# Altium PCB fileghep.PcbDoc (part 2 of 2)
Units mm, origin at the board's own origin, x right, y up, seen from the top; angles counter-clockwise.
Board outline 152.4 x 101.6 mm, 2 copper layers (Top Layer, Bottom Layer); 174 components, 42 nets, 882 pads, 102 vias.
Unrouted connection lines stored in the file: 150.
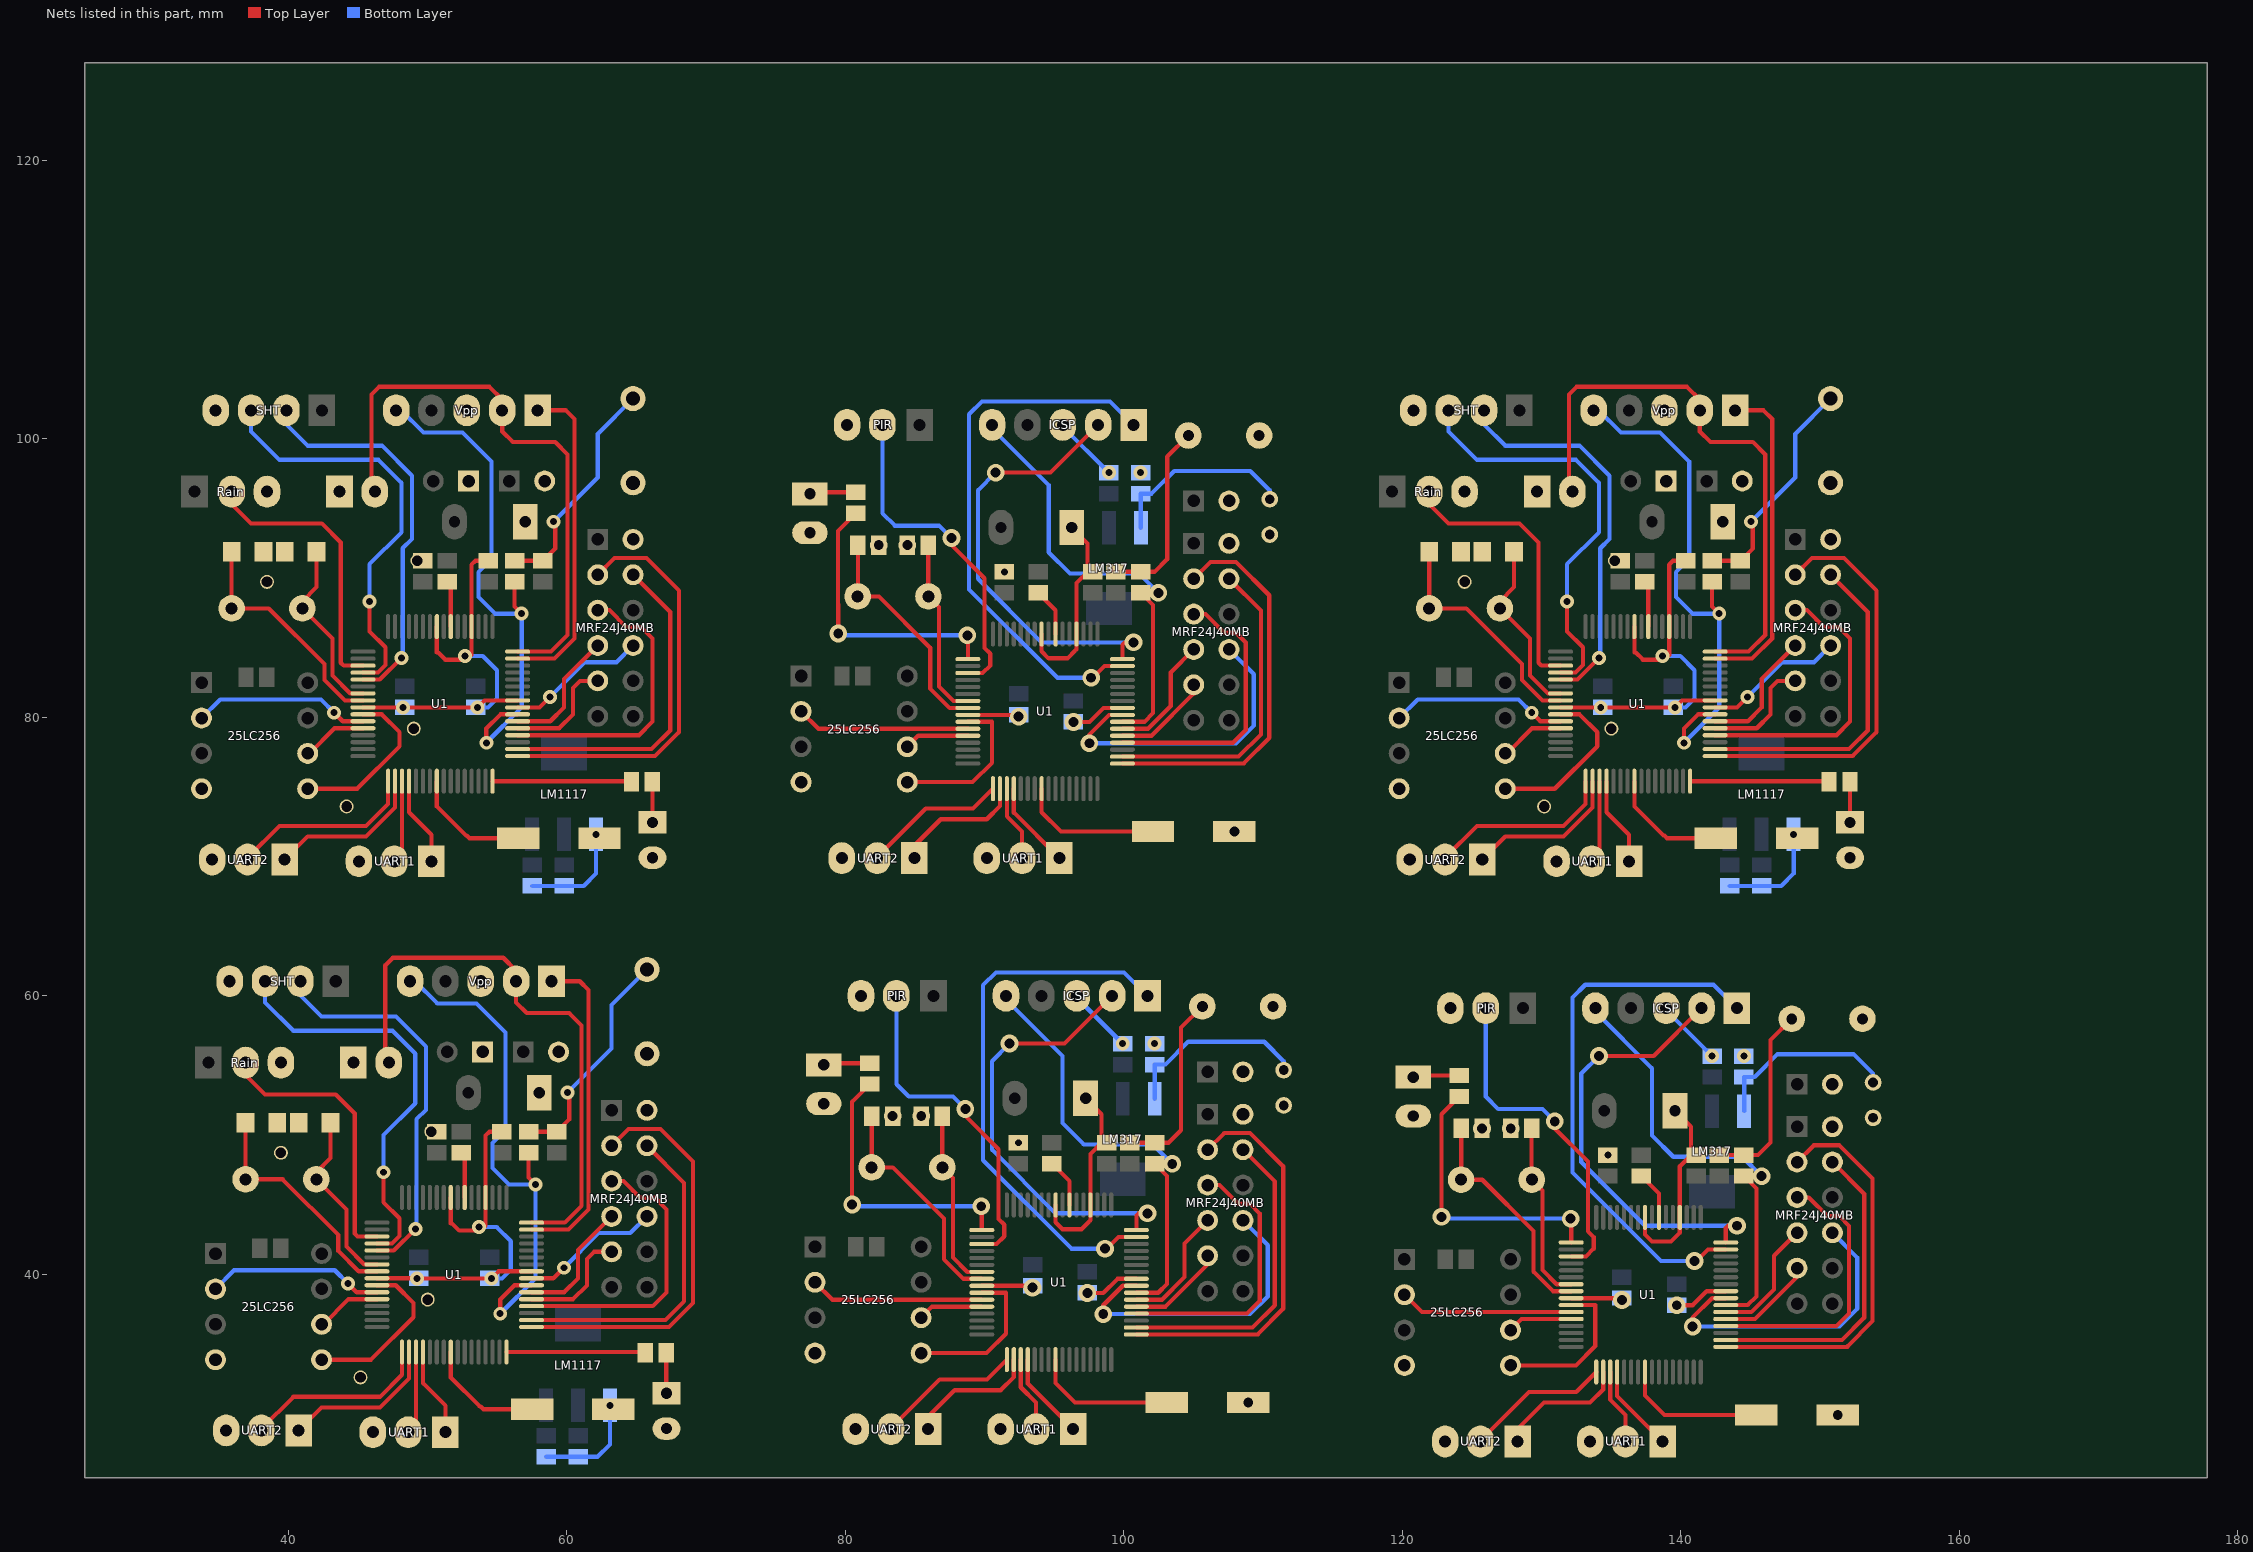
[diagram p2: the nets of this part, all layers, seen from the top]

## Via types
v1: diameter 1, hole 0.5, Top Layer to Bottom Layer, 57 vias
v2: diameter 1.27, hole 0.711, Top Layer to Bottom Layer, 45 vias

## Nets (pads, with @x,y where several pads share a name; then routed paths per layer and width w, separated by ;. In a path a pad name is that pad's centre, name@x,y a point inside that pad or via, vN(x,y) a via of type N, cw(c..) or ccw(c..) an arc to the next point about the centre after c; other vN are vias at no path point) (continued)
GND: 3.3.2 3.3V.2 5VDC.1 25LC256.4 C1.1 C2.1 C3.2 C4.1@54.352,91.245 C4.1@55.352,50.245 C4.1@140.352,91.245 C4.2@97.786,90.453 C4.2@98.786,49.453 C4.2@141.114,48.564 C5.1@91.436,90.453 C5.1@92.436,49.453 C5.1@134.764,48.564 C5.2@48.383,80.728 C5.2@49.383,39.728 C5.2@134.383,80.728 C6.2 C7.2 C8.1 C9.1 D0.2 D1.2 DIODE1.2 ICSP.3 LM317.1 LM1117.1 MQ6.1 MRF24J40MB.2 pad.0 PIR.3 Rain.3 SHT.4 SW.1 SW_BUTTON.1 U1.9 U1.20 U1.25 U1.41 UART1.3 UART2.3 Vpp.3 | length 192.3
  Top Layer w0.3: U1.41@45.373,80.72 48.252,80.72 v1(48.256,80.716) v1(53.59,80.716) 54.094,81.22 U1.9@56.473,81.22 ; U1.41@46.373,39.72 49.252,39.72 v1(49.256,39.716) v1(54.59,39.716) 55.094,40.22 U1.9@57.473,40.22 ; 50.673,84.649 U1.25@50.673,86.52 ; 50.773,84.649 51.277,84.145 52.828,84.145 53.173,84.49 U1.20@53.173,86.52 53.173,90.967 53.451,91.245 C4.1@54.352,91.245 ; 51.673,43.649 U1.25@51.673,45.52 ; 51.773,43.649 52.277,43.145 53.828,43.145 54.173,43.49 U1.20@54.173,45.52 54.173,49.967 54.451,50.245 C4.1@55.352,50.245 ; v2(84.463,92.37) C9.1@84.578,92.485 ; v2(85.463,51.37) C9.1@85.578,51.485 ; U1.41@88.807,80.182 92.321,80.182 v2(92.452,80.051) ; U1.41@89.807,39.182 93.321,39.182 v2(93.452,39.051) ; U1.25@94.107,85.982 94.107,84.746 94.611,84.242 95.966,84.242 96.507,84.783 ; U1.25@95.107,44.982 95.107,43.746 95.611,43.242 96.966,43.242 97.507,43.783 ; DIODE1.2@96.262,93.64 97.405,92.497 97.405,90.453 96.607,89.655 U1.20@96.607,85.982 96.607,84.883 ; v2(96.389,79.67) 97.532,79.67 98.544,80.682 U1.9@99.907,80.682 ; DIODE1.2@97.262,52.64 98.405,51.497 98.405,49.453 97.607,48.655 U1.20@97.607,44.982 97.607,43.883 ; v2(97.389,38.67) 98.532,38.67 99.544,39.682 U1.9@100.907,39.682 ; v2(127.791,50.481) C9.1@127.906,50.596 ; U1.41@131.373,80.72 134.252,80.72 v1(134.256,80.716) v1(139.59,80.716) 140.094,81.22 U1.9@142.473,81.22 ; U1.41@132.135,38.293 135.649,38.293 v2(135.78,38.162) ; 136.673,84.649 U1.25@136.673,86.52 ; 136.773,84.649 137.277,84.145 138.828,84.145 139.173,84.49 U1.20@139.173,86.52 139.173,90.967 139.451,91.245 C4.1@140.352,91.245 ; U1.25@137.435,44.093 137.435,42.857 137.939,42.353 139.294,42.353 139.835,42.894 ; DIODE1.2@139.59,51.751 140.733,50.608 140.733,48.564 139.935,47.766 U1.20@139.935,44.093 139.935,42.994 ; v2(139.717,37.781) 140.86,37.781 141.872,38.793 U1.9@143.235,38.793
  Bottom Layer w0.3: v1(52.701,84.399) 53.971,84.399 54.987,83.383 54.987,81.351 54.352,80.716 v1(53.59,80.716) ; v1(53.701,43.399) 54.971,43.399 55.987,42.383 55.987,40.351 55.352,39.716 v1(54.59,39.716) ; C1.1@57.527,67.901 C2.1@59.813,67.901 61.222,67.901 62.113,68.792 v1(62.113,71.593) ; C1.1@58.527,26.901 C2.1@60.813,26.901 62.222,26.901 63.113,27.792 v1(63.113,30.593) ; ICSP.3@95.627,101.006 95.627,100.867 C2.1@98.929,97.565 ; ICSP.3@96.627,60.006 96.627,59.867 C2.1@99.929,56.565 ; v1(138.701,84.399) 139.971,84.399 140.987,83.383 140.987,81.351 140.352,80.716 v1(139.59,80.716) ; ICSP.3@138.955,59.117 138.955,58.978 C2.1@142.257,55.676 ; C1.1@143.527,67.901 C2.1@145.813,67.901 147.222,67.901 148.113,68.792 v1(148.113,71.593)
  other v1: 134.764,48.564 92.436,49.453 142.257,55.688 144.543,55.688 99.929,56.577 102.215,56.577 91.436,90.453 98.929,97.577 101.215,97.577
  other v2: 151.274,29.907 108.946,30.796 125.735,50.481 83.407,51.37 107.946,71.796 82.407,92.37
INT: 
INT0: PIR.2 Rain.2 U1.35 | length 133.1
  Top Layer w0.3: Rain.2@35.937,96.21 35.937,95.321 37.334,93.924 42.414,93.924 43.776,92.562 43.776,83.926 43.982,83.72 U1.35@45.373,83.72 ; Rain.2@36.937,55.21 36.937,54.321 38.334,52.924 43.414,52.924 44.776,51.562 44.776,42.926 44.982,42.72 U1.35@46.373,42.72 ; v2(87.626,92.878) 87.626,92.37 90.007,89.989 90.007,84.983 90.42,84.57 90.42,83.734 89.868,83.182 U1.35@88.807,83.182 ; v2(88.626,51.878) 88.626,51.37 91.007,48.989 91.007,43.983 91.42,43.57 91.42,42.734 90.868,42.182 U1.35@89.807,42.182 ; Rain.2@121.937,96.21 121.937,95.321 123.334,93.924 128.414,93.924 129.776,92.562 129.776,83.926 129.982,83.72 U1.35@131.373,83.72 ; v2(130.954,50.989) 130.954,50.481 133.335,48.1 133.335,43.094 133.748,42.681 133.748,41.845 133.196,41.293 U1.35@132.135,41.293
  Bottom Layer w0.3: PIR.2@82.673,101.006 82.673,94.656 83.562,93.767 86.737,93.767 v2(87.626,92.878) ; PIR.2@83.673,60.006 83.673,53.656 84.562,52.767 87.737,52.767 v2(88.626,51.878) ; PIR.2@126.001,59.117 126.001,52.767 126.89,51.878 130.065,51.878 v2(130.954,50.989)
INT1_RP21: MRF24J40MB.5 U1.4 | length 122.8
  Top Layer w0.3: U1.4@56.473,78.72 65.183,78.72 66.163,79.7 66.163,85.669 65.331,86.501 64.269,86.501 63.069,87.701 MRF24J40MB.5@62.226,87.701 ; U1.4@57.473,37.72 66.183,37.72 67.163,38.7 67.163,44.669 66.331,45.501 65.269,45.501 64.069,46.701 MRF24J40MB.5@63.226,46.701 ; U1.4@99.907,78.182 107.855,78.182 108.765,79.092 108.765,85.374 108.062,86.077 107.208,86.077 105.868,87.417 MRF24J40MB.5@105.025,87.417 ; U1.4@100.907,37.182 108.855,37.182 109.765,38.092 109.765,44.374 109.062,45.077 108.208,45.077 106.868,46.417 MRF24J40MB.5@106.025,46.417 ; U1.4@142.473,78.72 151.183,78.72 152.163,79.7 152.163,85.669 151.331,86.501 150.269,86.501 149.069,87.701 MRF24J40MB.5@148.226,87.701 ; U1.4@143.235,36.293 151.183,36.293 152.093,37.203 152.093,43.485 151.39,44.188 150.536,44.188 149.196,45.528 MRF24J40MB.5@148.353,45.528
LED: R4.2 U1.33@88.807,84.182 U1.33@89.807,43.182 U1.33@132.135,42.293 U1.64@54.673,75.42 U1.64@55.673,34.42 U1.64@140.673,75.42 | length 92.5
  Top Layer w0.3: U1.64@54.673,75.42 64.613,75.42 R4.2@64.651,75.382 ; U1.64@55.673,34.42 65.613,34.42 R4.2@65.651,34.382 ; v2@79.244,85.766 v2(79.498,86.02) 79.498,88.101 79.493,88.106 79.493,93.392 R4.2@80.768,94.668 ; v2@80.244,44.766 v2(80.498,45.02) 80.498,47.101 80.493,47.106 80.493,52.392 R4.2@81.768,53.668 ; v2(88.769,85.893) 88.807,85.855 U1.33@88.807,84.182 ; v2(89.769,44.893) 89.807,44.855 U1.33@89.807,43.182 ; v2@122.572,43.877 v2(122.826,44.131) 122.826,46.212 122.821,46.217 122.821,51.503 R4.2@124.096,52.779 ; v2(132.097,44.004) 132.135,43.966 U1.33@132.135,42.293 ; U1.64@140.673,75.42 150.613,75.42 R4.2@150.651,75.382
  Bottom Layer w0.3: v2(79.498,86.02) 79.371,85.893 v2(88.769,85.893) ; v2(80.498,45.02) 80.371,44.893 v2(89.769,44.893) ; v2(122.826,44.131) 122.699,44.004 v2(132.097,44.004)
Net5VDC_2: 5VDC.2@110.486,95.672 5VDC.2@111.486,54.672 5VDC.2@153.814,53.783 C1.2@101.215,96.065 C1.2@102.215,55.065 C1.2@144.543,54.176 LM317.3 | length 40.8
  Bottom Layer w0.3: LM317.3@101.229,93.619 101.229,96.051 C1.2@101.215,96.065 101.989,96.065 103.628,97.704 109.089,97.704 110.486,96.307 5VDC.2@110.486,95.672 ; LM317.3@102.229,52.619 102.229,55.051 C1.2@102.215,55.065 102.989,55.065 104.628,56.704 110.089,56.704 111.486,55.307 5VDC.2@111.486,54.672 ; LM317.3@144.557,51.73 144.557,54.162 C1.2@144.543,54.176 145.317,54.176 146.956,55.815 152.417,55.815 153.814,54.418 5VDC.2@153.814,53.783
NetC6_1: C6.1@56.511,71.318 C6.1@57.511,30.318 C6.1@142.511,71.318 U1.56@50.673,75.42 U1.56@51.673,34.42 U1.56@136.673,75.42 | length 25.8
  Top Layer w0.3: U1.56@50.673,75.42 50.673,73.6 52.759,71.514 52.824,71.514 53.02,71.318 C6.1@56.511,71.318 ; U1.56@51.673,34.42 51.673,32.6 53.759,30.514 53.824,30.514 54.02,30.318 C6.1@57.511,30.318 ; U1.56@136.673,75.42 136.673,73.6 138.759,71.514 138.824,71.514 139.02,71.318 C6.1@142.511,71.318
NetC7_1: C7.1@102.104,71.796 C7.1@103.104,30.796 C7.1@145.432,29.907 U1.56@94.107,74.882 U1.56@95.107,33.882 U1.56@137.435,32.993 | length 30.8
  Top Layer w0.3: U1.56@94.107,74.882 94.107,73.189 95.5,71.796 C7.1@102.104,71.796 ; U1.56@95.107,33.882 95.107,32.189 96.5,30.796 C7.1@103.104,30.796 ; U1.56@137.435,32.993 137.435,31.3 138.828,29.907 C7.1@145.432,29.907
NetD0_1: D0.1 R4.1@66.151,75.382 R4.1@67.151,34.382 R4.1@152.151,75.382 | length 8.8
  Top Layer w0.3: R4.1@66.151,75.382 66.151,72.473 D0.1@66.163,72.461 ; R4.1@67.151,34.382 67.151,31.473 D0.1@67.163,31.461 ; R4.1@152.151,75.382 152.151,72.473 D0.1@152.163,72.461
NetD1_1: D1.1 R4.1@80.768,96.168 R4.1@81.768,55.168 R4.1@124.096,54.279 | length 10
  Top Layer w0.3: D1.1@77.466,96.053 77.581,96.168 R4.1@80.768,96.168 ; D1.1@78.466,55.053 78.581,55.168 R4.1@81.768,55.168 ; D1.1@120.794,54.164 120.909,54.279 R4.1@124.096,54.279
NetR1_1: R1.1 R2.1 SW.2 SW_BUTTON.2 | length 91.3
  Top Layer w0.3: R2.1@56.257,91.245 R1.1@58.289,91.245 59.178,92.134 59.178,94.178 v1(59.051,94.051) ; R2.1@57.257,50.245 R1.1@59.289,50.245 60.178,51.134 60.178,53.178 v1(60.051,53.051) ; R1.1@99.31,90.453 R2.1@101.215,90.453 102.219,90.453 103.12,91.354 103.12,98.72 SW_BUTTON.2@104.644,100.244 ; R1.1@100.31,49.453 R2.1@102.215,49.453 103.219,49.453 104.12,50.354 104.12,57.72 SW_BUTTON.2@105.644,59.244 ; R2.1@142.257,91.245 R1.1@144.289,91.245 145.178,92.134 145.178,94.178 v1(145.051,94.051) ; R1.1@142.638,48.564 R2.1@144.543,48.564 145.547,48.564 146.448,49.465 146.448,56.831 SW_BUTTON.2@147.972,58.355
  Bottom Layer w0.3: v1(59.051,94.051) 62.226,97.226 62.226,100.35 SW.2@64.766,102.89 ; v1(60.051,53.051) 63.226,56.226 63.226,59.35 SW.2@65.766,61.89 ; v1(145.051,94.051) 148.226,97.226 148.226,100.35 SW.2@150.766,102.89
OSCI: C9.2 U1.39 Y1.1 | length 77.7
  Top Layer w0.3: C9.2@42.033,91.892 42.033,89.352 41.017,88.336 Y1.1@41.017,87.828 43.176,85.669 43.176,83.002 44.458,81.72 U1.39@45.373,81.72 ; C9.2@43.033,50.892 43.033,48.352 42.017,47.336 Y1.1@42.017,46.828 44.176,44.669 44.176,42.002 45.458,40.72 U1.39@46.373,40.72 ; C9.2@85.963,92.37 85.963,88.699 Y1.1@85.975,88.687 86.737,87.925 86.737,82.21 87.765,81.182 U1.39@88.807,81.182 ; C9.2@86.963,51.37 86.963,47.699 Y1.1@86.975,47.687 87.737,46.925 87.737,41.21 88.765,40.182 U1.39@89.807,40.182 ; C9.2@128.033,91.892 128.033,89.352 127.017,88.336 Y1.1@127.017,87.828 129.176,85.669 129.176,83.002 130.458,81.72 U1.39@131.373,81.72 ; C9.2@129.291,50.481 129.291,46.81 Y1.1@129.303,46.798 130.065,46.036 130.065,40.321 131.093,39.293 U1.39@132.135,39.293
OSCO: C8.2 U1.40 Y1.2 | length 100.6
  Top Layer w0.3: C8.2@35.937,91.892 Y1.2@35.937,87.828 38.604,87.828 42.598,83.834 42.598,82.691 44.069,81.22 U1.40@45.373,81.22 ; C8.2@36.937,50.892 Y1.2@36.937,46.828 39.604,46.828 43.598,42.834 43.598,41.691 45.069,40.22 U1.40@46.373,40.22 ; C8.2@80.907,92.37 80.907,88.699 Y1.2@80.895,88.687 82.419,88.687 86.102,85.004 86.102,82.083 87.503,80.682 U1.40@88.807,80.682 ; C8.2@81.907,51.37 81.907,47.699 Y1.2@81.895,47.687 83.419,47.687 87.102,44.004 87.102,41.083 88.503,39.682 U1.40@89.807,39.682 ; C8.2@121.937,91.892 Y1.2@121.937,87.828 124.604,87.828 128.598,83.834 128.598,82.691 130.069,81.22 U1.40@131.373,81.22 ; C8.2@124.235,50.481 124.235,46.81 Y1.2@124.223,46.798 125.747,46.798 129.43,43.115 129.43,40.194 130.831,38.793 U1.40@132.135,38.793
PGC: ICSP.1 U1.15 Vpp.1 | length 188.5
  Top Layer w0.3: U1.15@56.473,84.22 59.126,84.22 60.57,85.664 60.57,101.417 59.935,102.052 Vpp.1@57.908,102.052 ; U1.15@57.473,43.22 60.126,43.22 61.57,44.663 61.57,60.417 60.935,61.052 Vpp.1@58.908,61.052 ; v2(97.659,82.845) 97.786,82.845 98.623,83.682 U1.15@99.907,83.682 ; v2(98.659,41.845) 98.786,41.845 99.623,42.682 U1.15@100.907,42.682 ; v2(140.987,40.956) 141.114,40.956 141.951,41.793 U1.15@143.235,41.793 ; U1.15@142.473,84.22 145.126,84.22 146.57,85.664 146.57,101.417 145.935,102.052 Vpp.1@143.908,102.052
  Bottom Layer w0.3: v2(97.659,82.845) 95.246,82.845 88.896,89.195 88.896,101.768 89.817,102.689 99.024,102.689 ICSP.1@100.707,101.006 ; v2(98.659,41.845) 96.246,41.845 89.896,48.195 89.896,60.768 90.817,61.689 100.024,61.689 ICSP.1@101.707,60.006 ; v2(140.987,40.956) 138.574,40.956 132.224,47.306 132.224,59.879 133.145,60.8 142.352,60.8 ICSP.1@144.035,59.117
PGD: ICSP.2 MQ6.2 U1.16 Vpp.2 | length 221.2
  Top Layer w0.3: MQ6.2@46.224,96.21 45.97,96.464 45.97,103.195 46.513,103.738 54.444,103.738 55.368,102.814 Vpp.2@55.368,102.052 55.368,100.528 56.13,99.766 59.178,99.766 60.067,98.877 60.067,85.923 58.864,84.72 U1.16@56.473,84.72 ; MQ6.2@47.224,55.21 46.97,55.464 46.97,62.195 47.513,62.738 55.444,62.738 56.368,61.814 Vpp.2@56.368,61.052 56.368,59.528 57.13,58.766 60.178,58.766 61.067,57.877 61.067,44.923 59.864,43.72 U1.16@57.473,43.72 ; v2(90.801,97.577) 94.738,97.577 ICSP.2@98.167,101.006 ; v2(91.801,56.577) 95.738,56.577 ICSP.2@99.167,60.006 ; U1.16@99.907,84.182 99.907,85.22 100.072,85.385 v2(100.707,85.385) ; U1.16@100.907,43.182 100.907,44.22 101.072,44.385 v2(101.707,44.385) ; MQ6.2@132.224,96.21 131.97,96.464 131.97,103.195 132.513,103.738 140.444,103.738 141.368,102.814 Vpp.2@141.368,102.052 141.368,100.528 142.13,99.766 145.178,99.766 146.067,98.877 146.067,85.923 144.864,84.72 U1.16@142.473,84.72 ; v2(134.129,55.688) 138.066,55.688 ICSP.2@141.495,59.117 ; U1.16@143.235,42.293 143.235,43.331 143.4,43.496 v2(144.035,43.496)
  Bottom Layer w0.3: v2(90.801,97.577) 89.531,96.307 89.531,89.957 94.103,85.385 v2(100.707,85.385) ; v2(91.801,56.577) 90.531,55.307 90.531,48.957 95.103,44.385 v2(101.707,44.385) ; v2(134.129,55.688) 132.859,54.418 132.859,48.068 137.431,43.496 v2(144.035,43.496)
RB10: R3.2 U1.23 | length 20.5
  Top Layer w0.3: R3.2@51.431,89.745 51.673,89.503 U1.23@51.673,86.52 ; R3.2@52.431,48.745 52.673,48.503 U1.23@52.673,45.52 ; R3.2@93.849,88.953 95.107,87.695 U1.23@95.107,85.982 ; R3.2@94.849,47.953 96.107,46.695 U1.23@96.107,44.982 ; R3.2@137.177,47.064 138.435,45.806 U1.23@138.435,44.093 ; R3.2@137.431,89.745 137.673,89.503 U1.23@137.673,86.52
RESET: 
RST_MRF: MRF24J40MB.3@62.226,90.241 MRF24J40MB.3@63.226,49.241 MRF24J40MB.3@148.226,90.241 U1.1@56.473,77.22 U1.1@57.473,36.22 U1.1@142.473,77.22 | length 89.3
  Top Layer w0.3: U1.1@56.473,77.22 66.35,77.22 68.068,78.938 68.068,89.098 65.725,91.441 63.426,91.441 MRF24J40MB.3@62.226,90.241 ; U1.1@57.473,36.22 67.35,36.22 69.068,37.938 69.068,48.098 66.725,50.441 64.426,50.441 MRF24J40MB.3@63.226,49.241 ; U1.1@142.473,77.22 152.35,77.22 154.068,78.938 154.068,89.098 151.725,91.441 149.426,91.441 MRF24J40MB.3@148.226,90.241
RSTMRF: MRF24J40MB.3@105.025,89.957 MRF24J40MB.3@106.025,48.957 MRF24J40MB.3@148.353,48.068 U1.1@99.907,76.682 U1.1@100.907,35.682 U1.1@143.235,34.793 | length 85.4
  Top Layer w0.3: U1.1@99.907,76.682 108.641,76.682 108.641,76.722 110.451,78.532 110.451,88.768 108.062,91.157 106.225,91.157 MRF24J40MB.3@105.025,89.957 ; U1.1@100.907,35.682 109.641,35.682 109.641,35.722 111.451,37.532 111.451,47.768 109.062,50.157 107.225,50.157 MRF24J40MB.3@106.025,48.957 ; U1.1@143.235,34.793 151.969,34.793 151.969,34.833 153.779,36.643 153.779,46.879 151.39,49.268 149.553,49.268 MRF24J40MB.3@148.353,48.068
SCK: 
SCK1_RP26: MRF24J40MB.9 U1.5 | length 45.8
  Top Layer w0.3: U1.5@56.473,79.22 59.46,79.22 60.448,80.208 60.448,82.113 60.956,82.621 MRF24J40MB.9@62.226,82.621 ; U1.5@57.473,38.22 60.46,38.22 61.448,39.208 61.448,41.113 61.956,41.621 MRF24J40MB.9@63.226,41.621 ; U1.5@99.907,78.682 102.005,78.682 105.025,81.702 MRF24J40MB.9@105.025,82.337 ; U1.5@100.907,37.682 103.005,37.682 106.025,40.702 MRF24J40MB.9@106.025,41.337 ; U1.5@142.473,79.22 145.46,79.22 146.448,80.208 146.448,82.113 146.956,82.621 MRF24J40MB.9@148.226,82.621 ; U1.5@143.235,36.793 145.333,36.793 148.353,39.813 MRF24J40MB.9@148.353,40.448
SCK2_RP3: 25LC256.6 U1.44 | length 28.2
  Top Layer w0.3: 25LC256.6@41.398,77.414 41.525,77.414 43.331,79.22 U1.44@45.373,79.22 ; 25LC256.6@42.398,36.414 42.525,36.414 44.331,38.22 U1.44@46.373,38.22 ; 25LC256.6@84.451,77.892 85.241,78.682 U1.44@88.807,78.682 ; 25LC256.6@85.451,36.892 86.241,37.682 U1.44@89.807,37.682 ; 25LC256.6@127.398,77.414 127.525,77.414 129.331,79.22 U1.44@131.373,79.22 ; 25LC256.6@127.779,36.003 128.569,36.793 U1.44@132.135,36.793
SCL1: SHT.2 U1.37@45.373,82.72 U1.37@46.373,41.72 U1.37@131.373,82.72 | length 85.1
  Top Layer w0.3: U1.37@45.373,82.72 46.577,82.72 v1(48.129,84.272) ; U1.37@46.373,41.72 47.577,41.72 v1(49.129,43.272) ; U1.37@131.373,82.72 132.577,82.72 v1(134.129,84.272)
  Bottom Layer w0.3: SHT.2@39.874,102.052 39.874,101.036 41.398,99.512 46.732,99.512 48.891,97.353 48.891,92.816 48.221,92.146 48.221,84.364 v1(48.129,84.272) ; SHT.2@40.874,61.052 40.874,60.036 42.398,58.512 47.732,58.512 49.891,56.353 49.891,51.816 49.221,51.146 49.221,43.364 v1(49.129,43.272) ; SHT.2@125.874,102.052 125.874,101.036 127.398,99.512 132.732,99.512 134.891,97.353 134.891,92.816 134.221,92.146 134.221,84.364 v1(134.129,84.272)
SDA1: SHT.3 U1.36@45.373,83.22 U1.36@46.373,42.22 U1.36@131.373,83.22 | length 90.6
  Top Layer w0.3: U1.36@45.373,83.22 46.442,83.22 46.986,83.764 46.986,85.034 45.843,86.177 v1(45.843,88.336) ; U1.36@46.373,42.22 47.442,42.22 47.986,42.764 47.986,44.034 46.843,45.177 v1(46.843,47.336) ; U1.36@131.373,83.22 132.442,83.22 132.986,83.764 132.986,85.034 131.843,86.177 v1(131.843,88.336)
  Bottom Layer w0.3: SHT.3@37.334,102.052 37.334,100.528 39.366,98.496 46.478,98.496 48.129,96.845 48.129,93.289 45.843,91.003 v1(45.843,88.336) ; SHT.3@38.334,61.052 38.334,59.528 40.366,57.496 47.478,57.496 49.129,55.845 49.129,52.289 46.843,50.003 v1(46.843,47.336) ; SHT.3@123.334,102.052 123.334,100.528 125.366,98.496 132.478,98.496 134.129,96.845 134.129,93.289 131.843,91.003 v1(131.843,88.336)
SDI: 
SDI1_RP27: MRF24J40MB.8 U1.8 | length 96.8
  Top Layer w0.3: U1.8@56.473,80.72 58.039,80.72 v1(58.797,81.478) ; U1.8@57.473,39.72 59.039,39.72 v1(59.797,40.478) ; v2(97.532,78.146) 97.532,78.781 98.933,80.182 U1.8@99.907,80.182 ; v2(98.532,37.146) 98.532,37.781 99.933,39.182 U1.8@100.907,39.182 ; v2(140.86,36.257) 140.86,36.892 142.261,38.293 U1.8@143.235,38.293 ; U1.8@142.473,80.72 144.039,80.72 v1(144.797,81.478)
  Bottom Layer w0.3: v1(58.797,81.478) 61.28,83.961 63.566,83.961 MRF24J40MB.8@64.766,85.161 ; v1(59.797,40.478) 62.28,42.961 64.566,42.961 MRF24J40MB.8@65.766,44.161 ; v2(97.532,78.146) 108.073,78.146 109.343,79.416 109.343,83.099 MRF24J40MB.8@107.565,84.877 ; v2(98.532,37.146) 109.073,37.146 110.343,38.416 110.343,42.099 MRF24J40MB.8@108.565,43.877 ; v2(140.86,36.257) 151.401,36.257 152.671,37.527 152.671,41.21 MRF24J40MB.8@150.893,42.988 ; v1(144.797,81.478) 147.28,83.961 149.566,83.961 MRF24J40MB.8@150.766,85.161
SDI2_RP4: 25LC256.2 U1.43 | length 75.9
  Top Layer w0.3: v1(43.303,80.335) 43.918,79.72 U1.43@45.373,79.72 ; v1(44.303,39.335) 44.918,38.72 U1.43@46.373,38.72 ; 25LC256.2@76.831,80.432 78.081,79.182 U1.43@88.807,79.182 ; 25LC256.2@77.831,39.432 79.081,38.182 U1.43@89.807,38.182 ; 25LC256.2@120.159,38.543 121.409,37.293 U1.43@132.135,37.293 ; v1(129.303,80.335) 129.918,79.72 U1.43@131.373,79.72
  Bottom Layer w0.3: 25LC256.2@33.778,79.954 35.118,81.294 42.344,81.294 v1(43.303,80.335) ; 25LC256.2@34.778,38.954 36.118,40.294 43.344,40.294 v1(44.303,39.335) ; 25LC256.2@119.778,79.954 121.118,81.294 128.344,81.294 v1(129.303,80.335)
SDO: 
SDO1_RP19: MRF24J40MB.7 U1.6 | length 54.3
  Top Layer w0.3: U1.6@56.473,79.72 58.817,79.72 59.813,80.716 59.813,82.748 MRF24J40MB.7@62.226,85.161 ; U1.6@57.473,38.72 59.817,38.72 60.813,39.716 60.813,41.748 MRF24J40MB.7@63.226,44.161 ; U1.6@99.907,79.182 101.743,79.182 103.374,80.813 103.374,83.226 MRF24J40MB.7@105.025,84.877 ; U1.6@100.907,38.182 102.743,38.182 104.374,39.813 104.374,42.226 MRF24J40MB.7@106.025,43.877 ; U1.6@142.473,79.72 144.817,79.72 145.813,80.716 145.813,82.748 MRF24J40MB.7@148.226,85.161 ; U1.6@143.235,37.293 145.071,37.293 146.702,38.924 146.702,41.337 MRF24J40MB.7@148.353,42.988
SDO2_RP2: 25LC256.5 U1.42 | length 70.1
  Top Layer w0.3: 25LC256.5@41.398,74.874 44.954,74.874 48.002,77.922 48.002,78.938 46.72,80.22 U1.42@45.373,80.22 ; 25LC256.5@42.398,33.874 45.954,33.874 49.002,36.922 49.002,37.938 47.72,39.22 U1.42@46.373,39.22 ; 25LC256.5@84.451,75.352 89.15,75.352 90.535,76.737 90.535,79.682 U1.42@88.807,79.682 ; 25LC256.5@85.451,34.352 90.15,34.352 91.535,35.737 91.535,38.682 U1.42@89.807,38.682 ; 25LC256.5@127.398,74.874 130.954,74.874 134.002,77.922 134.002,78.938 132.72,80.22 U1.42@131.373,80.22 ; 25LC256.5@127.779,33.463 132.478,33.463 133.863,34.848 133.863,37.793 U1.42@132.135,37.793
U1RX_RP22: U1.51 UART1.2 | length 34.3
  Top Layer w0.3: UART1.2@47.621,69.667 48.173,70.219 U1.51@48.173,75.42 ; UART1.2@48.621,28.667 49.173,29.219 U1.51@49.173,34.42 ; U1.51@91.607,74.882 91.607,72.895 92.706,71.796 UART1.2@92.706,69.891 ; U1.51@92.607,33.882 92.607,31.895 93.706,30.796 UART1.2@93.706,28.891 ; UART1.2@133.621,69.667 134.173,70.219 U1.51@134.173,75.42 ; U1.51@134.935,32.993 134.935,31.006 136.034,29.907 UART1.2@136.034,28.002
U1TX_RP25: U1.52 UART1.1 | length 38.3
  Top Layer w0.3: U1.52@48.673,75.42 48.673,73.187 50.288,71.572 UART1.1@50.288,69.667 ; U1.52@49.673,34.42 49.673,32.187 51.288,30.572 UART1.1@51.288,28.667 ; U1.52@92.107,74.882 92.107,73.157 UART1.1@95.373,69.891 ; U1.52@93.107,33.882 93.107,32.157 UART1.1@96.373,28.891 ; U1.52@134.673,75.42 134.673,73.187 136.288,71.572 UART1.1@136.288,69.667 ; U1.52@135.435,32.993 135.435,31.268 UART1.1@138.701,28.002
U2RX_RP24: U1.49 UART2.2 | length 71.6
  Top Layer w0.3: UART2.2@37.08,69.794 37.08,69.921 39.366,72.207 45.589,72.207 47.173,73.791 U1.49@47.173,75.42 ; UART2.2@38.08,28.794 38.08,28.921 40.366,31.207 46.589,31.207 48.173,32.791 U1.49@48.173,34.42 ; UART2.2@82.292,69.891 82.292,69.956 85.783,73.447 89.172,73.447 U1.49@90.607,74.882 ; UART2.2@83.292,28.891 83.292,28.956 86.783,32.447 90.172,32.447 U1.49@91.607,33.882 ; UART2.2@123.08,69.794 123.08,69.921 125.366,72.207 131.589,72.207 133.173,73.791 U1.49@133.173,75.42 ; UART2.2@125.62,28.002 125.62,28.067 129.111,31.558 132.5,31.558 U1.49@133.935,32.993
U2TX_RP23: U1.50 UART2.1 | length 62.5
  Top Layer w0.3: UART2.1@39.747,69.794 41.398,71.445 45.589,71.445 47.673,73.529 U1.50@47.673,75.42 ; UART2.1@40.747,28.794 42.398,30.445 46.589,30.445 48.673,32.529 U1.50@48.673,34.42 ; UART2.1@84.959,69.891 84.959,70.78 86.864,72.685 90.166,72.685 91.107,73.626 U1.50@91.107,74.882 ; UART2.1@85.959,28.891 85.959,29.78 87.864,31.685 91.166,31.685 92.107,32.626 U1.50@92.107,33.882 ; UART2.1@125.747,69.794 127.398,71.445 131.589,71.445 133.673,73.529 U1.50@133.673,75.42 ; UART2.1@128.287,28.002 128.287,28.891 130.192,30.796 133.494,30.796 134.435,31.737 U1.50@134.435,32.993
VPP: ICSP.5 R2.2 U1.7 Vpp.5 | length 213.8
  Top Layer w0.3: v1(54.225,78.176) 54.225,79.192 55.253,80.22 U1.7@56.473,80.22 ; v1(55.225,37.176) 55.225,38.192 56.253,39.22 U1.7@57.473,39.22 ; R2.2@56.257,89.745 56.257,87.955 v1(56.765,87.447) ; R2.2@57.257,48.745 57.257,46.955 v1(57.765,46.447) ; U1.7@99.907,79.682 101.481,79.682 102.104,80.305 102.104,88.064 R2.2@101.215,88.953 102.473,88.953 v2(102.485,88.941) ; U1.7@100.907,38.682 102.481,38.682 103.104,39.305 103.104,47.064 R2.2@102.215,47.953 103.473,47.953 v2(103.485,47.941) ; v1(140.225,78.176) 140.225,79.192 141.253,80.22 U1.7@142.473,80.22 ; R2.2@142.257,89.745 142.257,87.955 v1(142.765,87.447) ; U1.7@143.235,37.793 144.809,37.793 145.432,38.416 145.432,46.175 R2.2@144.543,47.064 145.801,47.064 v2(145.813,47.052)
  Bottom Layer w0.3: Vpp.5@47.748,102.052 48.114,102.052 49.707,100.459 52.516,100.459 54.606,98.369 54.606,91.367 53.668,90.429 53.668,88.639 54.86,87.447 v1(56.765,87.447) 56.765,80.716 v1(54.225,78.176) ; Vpp.5@48.748,61.052 49.114,61.052 50.707,59.459 53.516,59.459 55.606,57.369 55.606,50.367 54.668,49.429 54.668,47.639 55.86,46.447 v1(57.765,46.447) 57.765,39.716 v1(55.225,37.176) ; ICSP.5@90.547,101.006 90.547,100.752 94.611,96.688 94.611,91.862 96.135,90.338 101.088,90.338 v2(102.485,88.941) ; ICSP.5@91.547,60.006 91.547,59.752 95.611,55.688 95.611,50.862 97.135,49.338 102.088,49.338 v2(103.485,47.941) ; Vpp.5@133.748,102.052 134.114,102.052 135.707,100.459 138.516,100.459 140.606,98.369 140.606,91.367 139.668,90.429 139.668,88.639 140.86,87.447 v1(142.765,87.447) 142.765,80.716 v1(140.225,78.176) ; ICSP.5@133.875,59.117 133.875,58.863 137.939,54.799 137.939,49.973 139.463,48.449 144.416,48.449 v2(145.813,47.052)
WAKE: MRF24J40MB.4 U1.2 | length 139.6
  Top Layer w0.3: U1.2@56.473,77.72 66.088,77.72 67.433,79.065 67.433,87.574 MRF24J40MB.4@64.766,90.241 ; U1.2@57.473,36.72 67.088,36.72 68.433,38.065 68.433,46.574 MRF24J40MB.4@65.766,49.241 ; U1.2@99.907,77.182 108.252,77.182 109.851,78.781 109.851,87.671 MRF24J40MB.4@107.565,89.957 ; U1.2@100.907,36.182 109.252,36.182 110.851,37.781 110.851,46.671 MRF24J40MB.4@108.565,48.957 ; U1.2@142.473,77.72 152.088,77.72 153.433,79.065 153.433,87.574 MRF24J40MB.4@150.766,90.241 ; U1.2@143.235,35.293 151.58,35.293 153.179,36.892 153.179,45.782 MRF24J40MB.4@150.893,48.068
pads on no net: LM317.4 LM1117.4 MRF24J40MB.10 MRF24J40MB.11 MRF24J40MB.12 R7.1 U1.11 U1.12 U1.13 U1.14 U1.17 U1.18 U1.22 U1.24 U1.27 U1.28 U1.29 U1.30 U1.31 U1.32 U1.33@45.373,84.72 U1.33@46.373,43.72 U1.33@131.373,84.72 U1.34 U1.36@88.807,82.682 U1.36@89.807,41.682 U1.36@132.135,40.793 U1.37@88.807,82.182 U1.37@89.807,41.182 U1.37@132.135,40.293 U1.46 U1.47 U1.48 U1.53 U1.54 U1.55 U1.57 U1.58 U1.59 U1.60 U1.61 U1.62 U1.63 U1.64@98.107,74.882 U1.64@99.107,33.882 U1.64@141.435,32.993
copper on no net: | length 10
  Top Layer w0.3: 33.778,82.494 34.159,82.875 36.965,82.875 ; 34.778,41.494 35.159,41.875 37.965,41.875 ; 119.778,82.494 120.159,82.875 122.965,82.875

## Polygon pours and split planes (outlines as drawn)
GND on Top Layer "Top Layer-No Net 1" (solid, pour order 14): 118,61.4 155.719,61.4 155.719,26 118,26
GND on Top Layer "Top Layer-No Net 1" (solid, pour order 6): 118,104.592 154.83,104.592 155.211,104.211 155.211,67 118,67
GND on Top Layer "Top Layer-No Net 1" (solid, pour order 14): 75.672,62.289 113.391,62.289 113.391,26.889 75.672,26.889
GND on Top Layer "Top Layer-No Net 1" (solid, pour order 6): 33,63.592 69.83,63.592 70.211,63.211 70.211,26 33,26
GND on Top Layer "Top Layer-No Net 1" (solid, pour order 14): 74.672,103.289 112.391,103.289 112.391,67.889 74.672,67.889
GND on Top Layer "Top Layer-No Net 1" (solid, pour order 6): 32,104.592 68.83,104.592 69.211,104.211 69.211,67 32,67
GND on Bottom Layer "Top Layer-No Net 1" (solid, pour order 12): 118,61.4 155.719,61.4 155.719,26 118,26
GND on Bottom Layer "Top Layer-No Net 1" (solid, pour order 4): 118,104.592 118.381,104.211 155.211,104.211 155.211,67 118,67
GND on Bottom Layer "Top Layer-No Net 1" (solid, pour order 12): 75.672,62.289 113.391,62.289 113.391,26.889 75.672,26.889
GND on Bottom Layer "Top Layer-No Net 1" (solid, pour order 4): 33,63.592 33.381,63.211 70.211,63.211 70.211,26 33,26
GND on Bottom Layer "Top Layer-No Net 1" (solid, pour order 12): 74.672,103.289 112.391,103.289 112.391,67.889 74.672,67.889
GND on Bottom Layer "Top Layer-No Net 1" (solid, pour order 4): 32,104.592 32.381,104.211 69.211,104.211 69.211,67 32,67

## Keep-outs
Keep-Out Layer:
  lines w0.3: 32,67 69.211,67 69.211,104.211 68.83,104.592 32,104.592 32,67 ; 33,26 70.211,26 70.211,63.211 69.83,63.592 33,63.592 33,26 ; 74.672,67.889 112.391,67.889 112.391,103.289 74.672,103.289 74.672,67.889 ; 75.672,26.889 113.391,26.889 113.391,62.289 75.672,62.289 75.672,26.889 ; 118,26 118,61.4 155.719,61.4 155.719,26 118,26 ; 118,67 118,104.592 154.83,104.592 155.211,104.211 155.211,67 118,67

## Silkscreen, mask and mechanical layers (free items; w line width, h text height)
Top Overlay:
  lines w0.254: 26.201,28.003 26.699,26.476 ; 26.445,26.478 26.953,26.475 ; 26.682,103.955 27.199,105.476 ; 26.898,57.952 26.699,26.476 ; 26.945,105.478 27.453,105.475 ; 27,74 27.199,105.476 ; 27.217,27.997 26.699,26.476 ; 27.698,103.949 27.199,105.476 ; 31.237,110 31.239,110.508 ; 32.761,109.743 31.238,110.254 ; 32.763,110.759 31.238,110.254 ; 84.96,110.145 31.238,110.254 ; 102.278,110.109 156,110 ; 154.475,109.495 156,110 ; 154.477,110.511 156,110 ; 155.999,109.746 156.001,110.254
  text "124.762 (mm)" at 85.212,109.23 h1.52 r359.88
  text "79.002 (mm)" at 27.814,58.201 h1.52 r89.64

## Text inside footprints (layer, text, board x,y; h text height)
MRF24J40MB: Top Overlay "12" at 150.385,35.876 h1.27 r270; Top Overlay "1" at 147.845,34.86 h1.27 r270; Top Overlay "1" at 147.845,35.876 h1.27 r270; Top Overlay "1" at 147.845,53.148 h1.27 r270; Top Overlay "2" at 150.385,53.148 h1.27 r270
MRF24J40MB: Top Overlay "2" at 150.258,95.321 h1.27 r270; Top Overlay "1" at 147.718,95.321 h1.27 r270; Top Overlay "1" at 147.718,78.049 h1.27 r270; Top Overlay "1" at 147.718,77.033 h1.27 r270; Top Overlay "12" at 150.258,78.049 h1.27 r270
MRF24J40MB: Top Overlay "12" at 108.057,36.765 h1.27 r270; Top Overlay "1" at 105.517,35.749 h1.27 r270; Top Overlay "1" at 105.517,36.765 h1.27 r270; Top Overlay "1" at 105.517,54.037 h1.27 r270; Top Overlay "2" at 108.057,54.037 h1.27 r270
MRF24J40MB: Top Overlay "2" at 65.258,54.321 h1.27 r270; Top Overlay "1" at 62.718,54.321 h1.27 r270; Top Overlay "1" at 62.718,37.049 h1.27 r270; Top Overlay "1" at 62.718,36.033 h1.27 r270; Top Overlay "12" at 65.258,37.049 h1.27 r270
MRF24J40MB: Top Overlay "12" at 107.057,77.765 h1.27 r270; Top Overlay "1" at 104.517,76.749 h1.27 r270; Top Overlay "1" at 104.517,77.765 h1.27 r270; Top Overlay "1" at 104.517,95.037 h1.27 r270; Top Overlay "2" at 107.057,95.037 h1.27 r270
MRF24J40MB: Top Overlay "2" at 64.258,95.321 h1.27 r270; Top Overlay "1" at 61.718,95.321 h1.27 r270; Top Overlay "1" at 61.718,78.049 h1.27 r270; Top Overlay "1" at 61.718,77.033 h1.27 r270; Top Overlay "12" at 64.258,78.049 h1.27 r270